# EAGLE board i2c-pwm (EAGLE 5.05)
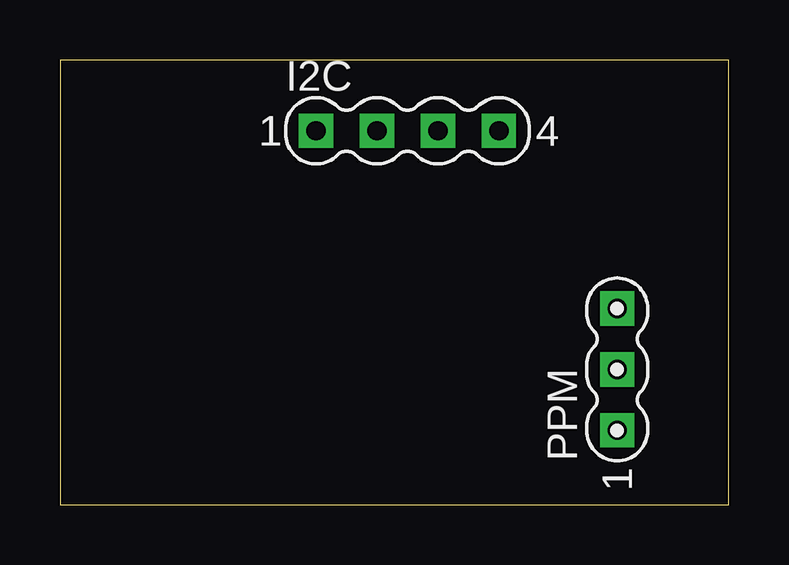
[diagram p0: board, top side]
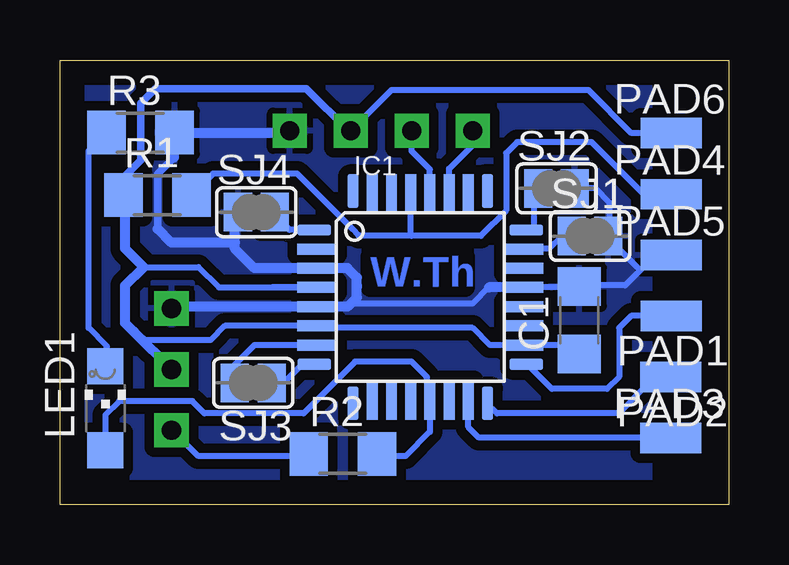
[diagram p1: board, bottom side, seen from below]

Size 27.86 x 18.53 mm. Coordinates in mm from the lower left corner, seen from the top.
Outline: 0,0 27.86,0 27.86,18.53 0,18.53 0,0
Copper layers (1*16): Top 0.035mm / dielectric 1.5mm / Bottom 0.035mm
Design rules "Bilex DRU": minimum track width 10mil, minimum drill 24mil, track to track 10mil, track to pad 10mil, pad to pad 10mil, via to via 10mil, smd to smd 10mil, copper to edge 40mil, drill to drill 8mil, minimum pad ring 10mil, minimum via ring 8mil, stop-mask expansion 4mil, vias tented up to drill 0mil, thermal gap 10mil

## Footprints (pad centres in the part's own frame; a part is rotated, then mirrored left to right if it is on the bottom)
C1206 = smd 1.6 x 1.8: 1 -1.4,0; 2 1.4,0
MA04-1 = drill 0.8 pad 1.422 square: 1 -3.81,0; 2 -1.27,0; 3 1.27,0; 4 3.81,0
TQFP32-08 = smd 1.397 x 0.457: 1 -4.42,2.8; 8 -4.42,-2.8; 17 4.42,-2.8; 24 4.42,2.8 | smd 1.651 x 0.457: 2 -4.293,2; 3 -4.293,1.2; 4 -4.293,0.4; 5 -4.293,-0.4; 6 -4.293,-1.2; 7 -4.293,-2; 18 4.293,-2; 19 4.293,-1.2; 20 4.293,-0.4; 21 4.293,0.4; 22 4.293,1.2; 23 4.293,2 | smd 0.457 x 1.397: 9 -2.8,-4.42; 16 2.8,-4.42; 25 2.8,4.42; 32 -2.8,4.42 | smd 0.457 x 1.651: 10 -2,-4.293; 11 -1.2,-4.293; 12 -0.4,-4.293; 13 0.4,-4.293; 14 1.2,-4.293; 15 2,-4.293; 26 2,4.293; 27 1.2,4.293; 28 0.4,4.293; 29 -0.4,4.293; 30 -1.2,4.293; 31 -2,4.293
CHIPLED_1206 = smd 1.5 x 1.5: A 0,-1.75; C 0,1.75
SMD1,27-2,54 = smd 1.27 x 2.54: 1 0,0
MA03-1 = drill 0.8 pad 1.422 square: 1 -2.54,0; 2 0,0; 3 2.54,0
R1206 = smd 1.6 x 1.803: 1 -1.422,0; 2 1.422,0
SJ = smd 1.168 x 1.6: 1 -0.762,0; 2 0.762,0

## Placement (x,y rotation side)
C1  100nF  [C1206]  6.22,7.69 90 bottom
I2C  4pin  [MA04-1]  14.48,15.58 0 top
IC1  MEGA8-AI  [TQFP32-08]  12.85,8.65 0 bottom
LED1  grn  [CHIPLED_1206]  25.97,4.02 0 bottom
PAD1  [SMD1,27-2,54]  2.4,7.86 90 bottom
PAD2  [SMD1,27-2,54]  2.41,5.32 90 bottom
PAD3  [SMD1,27-2,54]  2.41,2.79 270 bottom
PAD4  [SMD1,27-2,54]  2.39,12.94 270 bottom
PAD5  [SMD1,27-2,54]  2.39,10.4 270 bottom
PAD6  [SMD1,27-2,54]  2.39,15.48 270 bottom
PPM  3pin  [MA03-1]  23.22,5.64 90 top
R1  100k  [R1206]  23.8,12.9 0 bottom
R2  1k  [R1206]  16.08,2.12 0 bottom
R3  330  [R1206]  24.51,15.51 0 bottom
SJ1  rate_bit1  [SJ]  5.78,11.2 0 bottom
SJ2  rate_bit2  [SJ]  7.18,13.18 0 bottom
SJ3  adr_bit1  [SJ]  19.81,5.08 180 bottom
SJ4  adr_bit2  [SJ]  19.68,12.19 0 bottom

## Library data of the parts
C1 = rcl
I2C PPM = TricopterSpecial
IC1 = atmel
LED1 = led
PAD1-PAD6 = wirepad
R1-R3 = resistor
SJ1-SJ4 = jumper

## Nets
+5V: C1.1 I2C.3 IC1.4 IC1.6 IC1.18 PAD6.1 PPM.2 R1.1
GND: C1.2 I2C.4 IC1.3 IC1.5 IC1.21 PAD5.1 PPM.3 R3.2 SJ1.2 SJ2.2 SJ4.1
N$1: IC1.29 PAD4.1 R1.2
N$2: LED1.C R3.1
N$3: IC1.1 SJ4.2
N$4: IC1.13 LED1.A R2.2
N$5: IC1.15 PAD3.1
N$6: IC1.16 PAD2.1
N$7: IC1.17 PAD1.1
N$8: IC1.23 SJ1.1
N$9: I2C.1 IC1.27
N$10: I2C.2 IC1.28
N$11: IC1.24 SJ2.1
N$12: PPM.1 R2.1
N$13: IC1.7 SJ3.2
N$14: IC1.8 SJ3.1

## Tracks (layer width: path | path; a pad name or v marks a point on that pad's centre or on a via)
+5V
  Bottom 0.254: 19.03,9.05 IC1.4 21.25,9.05 22.1,9.91 24.38,9.91 | 5.59,6.22 6.16,6.22 C1.1 6.22,6.65 IC1.18 9.96,6.65 10.67,7.37 17.06,7.37 IC1.6 20.99,7.45 21.59,6.86 24.43,6.86 | PAD6.1 4.05,15.48 5.84,17.27 14.06,17.27 I2C.3 15.84,15.58 | PPM.2 23.16,5.59 | 25.15,12.83 R1.1 25.3,12.98 25.4,12.98
  Bottom 0.305: 15.84,15.58 17.6,17.34 23.89,17.34 24.51,16.72 24.51,14.36 25.4,13.46
  Bottom 0.406: 25.4,13.46 25.4,12.98 | 24.79,7.21 25.15,7.57 25.15,9.14 24.38,9.91 25.15,10.67 25.15,12.83 | 24.79,7.21 PPM.2 | 24.43,6.86 24.79,7.21
GND
  Bottom 0.254: IC1.3 | IC1.21 6.26,9.05 C1.2 6.17,9.14 4.32,9.14 3.68,9.78 | SJ2.2 5.56,13.18 4.95,12.57 4.95,11.26 SJ1.2 5.02,11.11 3.68,9.78 | PAD5.1 3.06,10.4 3.68,9.78 | 15.49,9.14 15.4,9.05 | 10,9.05 10.67,8.38 15.75,8.38
  Bottom 0.305: 20.57,11.94 SJ4.1 | 23.8,11.49 23.8,13.79 23.11,14.48 | 23.11,15.48 R3.2 | 18.36,15.51 I2C.4
  Bottom 0.406: IC1.3 15.89,9.86 15.49,9.46 15.49,9.14 15.49,8.64 15.75,8.38 15.88,8.25 IC1.5 23.14,8.25 PPM.3 | IC1.21 10,9.05 | 20.57,10.92 20.57,10.67 19.76,9.86 IC1.3 | 20.57,10.92 20.57,11.94 | 20.57,10.92 23.23,10.92 23.8,11.49 | 23.11,14.48 23.11,15.48 | R3.2 18.36,15.51
  pour Bottom (isolate 0.406): 3.3,0.76 27.43,0.76 27.43,17.78 3.3,18.03
N$1
  Bottom 0.254: 13.21,11.2 10.32,11.2 9.27,12.26 9.27,14.66 8.81,15.11 5.71,15.11 3.56,12.95 2.41,12.95 PAD4.1 | 13.21,11.2 15.42,11.2 15.67,11.49 17.98,13.8 21.48,13.8 R1.2 | IC1.29 13.25,11.24 13.21,11.2
N$2
  Bottom 0.254: R3.1 26.44,15.21 26.67,14.73 26.67,7.37 25.91,6.6 25.91,5.84 LED1.C
N$3
  Bottom 0.254: IC1.1 18.31,11.45 SJ4.2
N$4
  Bottom 0.254: IC1.13 12.47,4.34 | IC1.13 12.57,5.33 13.21,5.97 15.56,5.97 17.21,4.32 17.72,3.81 21.84,3.81 22.35,4.32 25.4,4.32 25.97,3.74 LED1.A | IC1.13 12.45,3.04 13.46,2.03 14.57,2.03 R2.2
N$5
  Bottom 0.254: IC1.15 10.85,3.23 10.41,2.79 PAD3.1
N$6
  Bottom 0.254: PAD2.1 2.9,4.83 3.56,4.83 4.57,3.81 9.65,3.81 10.08,4.23 IC1.16
N$7
  Bottom 0.254: IC1.17 8.39,5.85 7.37,4.83 5.08,4.83 4.57,5.33 4.57,7.37 4.06,7.87 2.64,7.87 PAD1.1
N$8
  Bottom 0.254: IC1.23 8.54,10.67 7.49,10.67 6.96,11.2 SJ1.1
N$9
  Bottom 0.254: IC1.27 11.65,14 10.67,14.99 I2C.1
N$10
  Bottom 0.254: IC1.28 12.45,13.98 13.21,14.73 I2C.2
N$11
  Bottom 0.254: 7.68,12.74 7.53,12.74 7.53,12.48 SJ2.1 8.13,12.99 8.13,11.43 8.15,11.45 IC1.24
N$12
  Bottom 0.254: R2.1 18.12,2.12 18.21,2.03 22.1,2.03 23.16,3.1 PPM.1
N$13
  Bottom 0.254: IC1.7 19.76,6.65 20.83,5.59 20.83,5.33 SJ3.2
N$14
  Bottom 0.254: IC1.8 17.77,5.85 18.54,5.08 SJ3.1

## Text on the board
Bottom: W.Th